# Altium PCB 4GLL.PcbDoc
Units mil, origin at the board's own origin, x right, y up, seen from the top; angles counter-clockwise.
Board outline 6000 x 4000 mil, 2 copper layers (Top Layer, Bottom Layer); 23 components, 12 nets, 284 pads, 0 vias.
Unrouted connection lines stored in the file: 42.
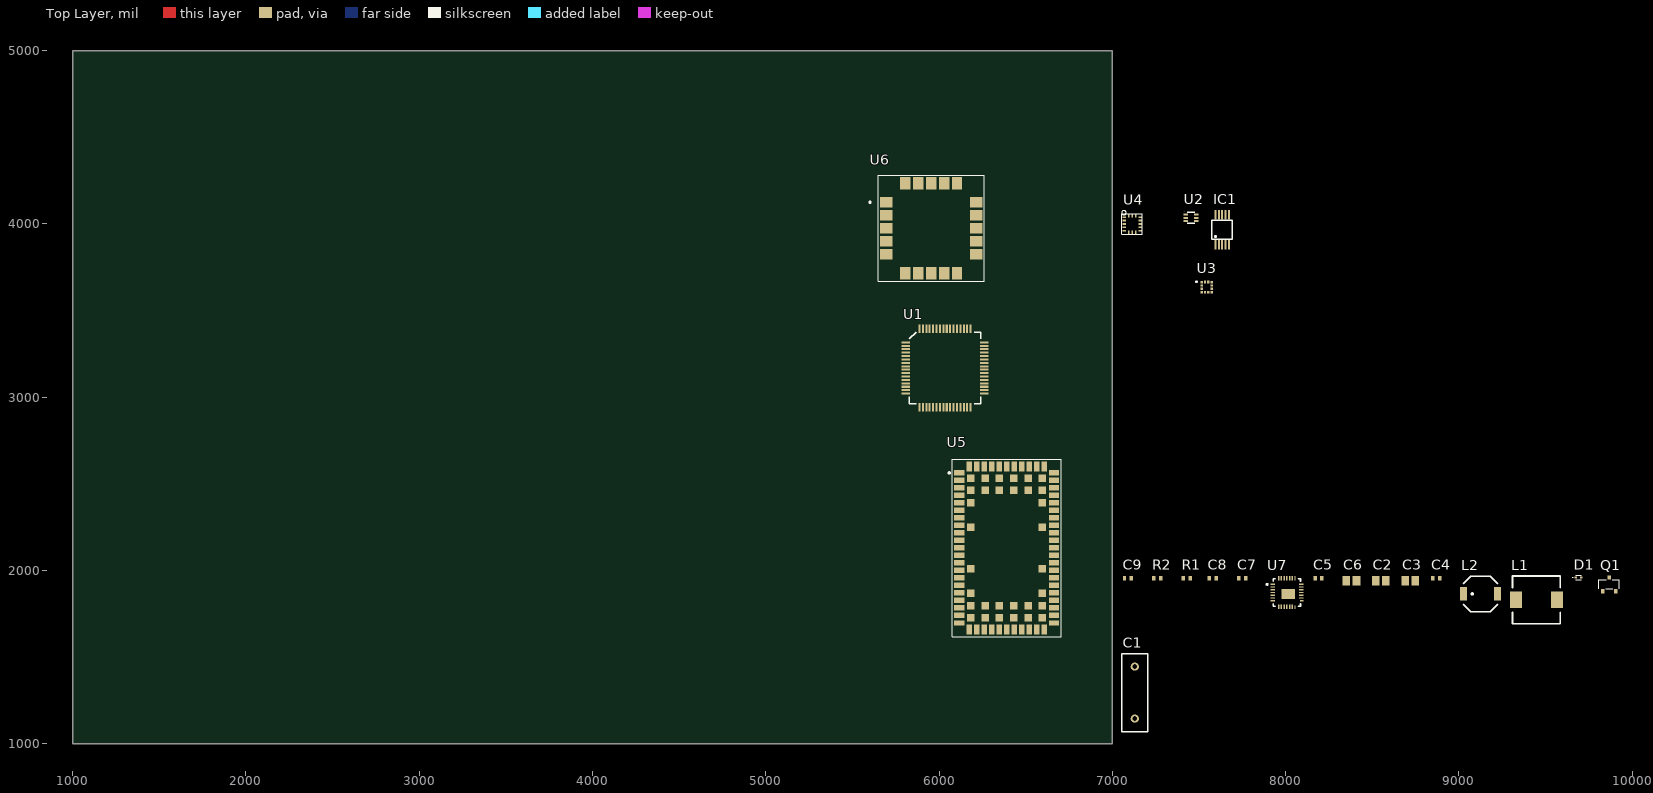
[diagram p0: Top Layer view]
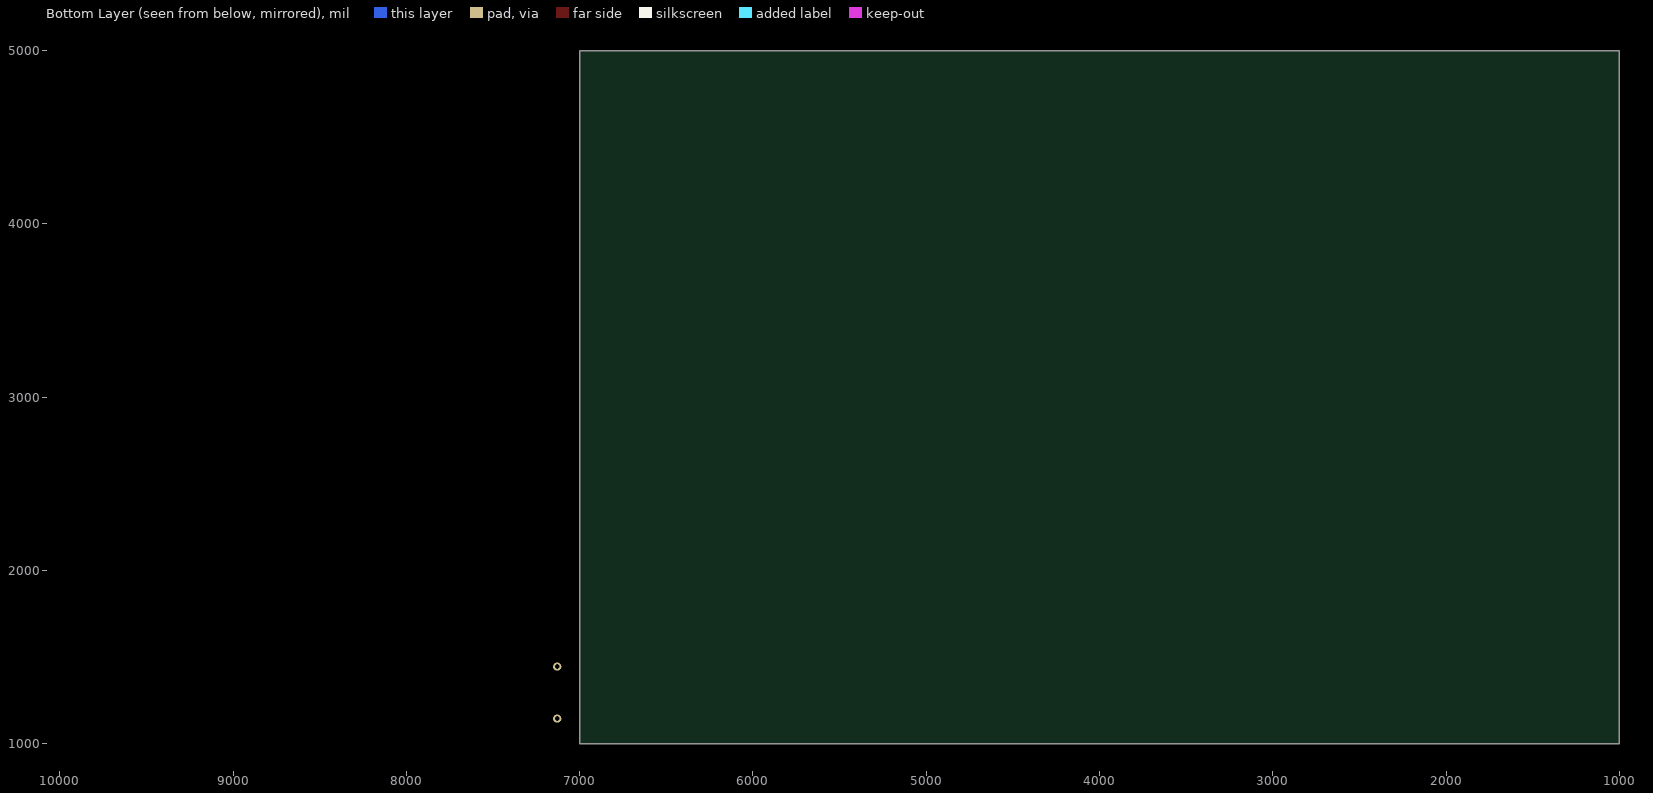
[diagram p1: Bottom Layer view, seen from below]

## Layer stack, top to bottom
Top Solder: solder mask 0.4, Solder Resist, Dk 3.5
Top Layer: signal copper 1.4
Dielectric 1: dielectric 12.6, FR-4, Dk 4.8
Bottom Layer: signal copper 1.4
Bottom Solder: solder mask 0.4, Solder Resist, Dk 3.5

## Board outline
1000,1000 7000,1000 7000,5000 1000,5000

## Design rules (kind name [scope] priority, off if disabled: settings)
Clearance [All] p1: gap=10 ignorepadtopadclearanceinfootprint=FALSE except(0: Arc-Hole Track-Hole SMDPad-Hole THPad-Hole Via-Hole Fill-Hole Poly-Hole Region-Hole Text-Hole)
PolygonConnect [All] p1: connectstyle=Relief reliefconductorwidth=10 reliefentries=4 polygonreliefangle="90 Angle" airgapwidth=10
RoomDefinition GPS [InComponentClass('GPS')] p1: confinementstyle=ConfineIn formatcopy=TRUE lockcomponents=FALSE outline 0,0 2000,0 2000,1000 0,1000
RoomDefinition 4G [InComponentClass('4G')] p2: confinementstyle=ConfineIn formatcopy=TRUE lockcomponents=FALSE outline 0,0 2000,0 2000,1000 0,1000
RoutingVias [All] p1: holewidth=28 width=50 viastyle="Through Hole" minholewidth=28 minwidth=50 maxholewidth=28 maxwidth=50
SolderMaskExpansion [All] p1: expansion=4 istentingtop=FALSE
Width [All] p1: maxlimit=10 minlimit=10 preferedwidth=10
30 further rules are at their usual default settings.

## Classes and differential pairs
component class GPS: U6
component class 4G: U5

## Components (designator, comment, footprint, x,y, rotation, side; value= is the part's Value field where it differs from the comment)
C1 "Cap" RAD-0.3 7130,1295 r90 top value=100pF
C2 "Cap_0805" 0805 8550,1940 r0 top value=100nF
C3 "Cap_0805" 0805 8720,1940 r0 top value=100nF
C4 "Cap_0402" 0402 8870,1955 r0 top value=100nF
C5 "Cap_0402" 0402 8190,1955 r0 top value=100nF
C6 "Cap_0805" 0805 8380,1940 r0 top value=100nF
C7 "Cap_0402" 0402 7750,1955 r0 top value=100nF
C8 "Cap_0402" 0402 7580,1955 r0 top value=100nF
C9 "Cap_0402" 0402 7090,1955 r0 top value=100nF
D1 "NSR0140P2" SOD-923 9675,1960 r0 top
IC1 "INA226" VSSOP-10 7595,3880 r90 top
L1 "SRR7045-102M" SRR7045-102M 9330,1830 r0 top value=X
L2 "SD53-4R7-R" SD53-4R7-R 9125,1865 r0 top value=X
Q1 "PMV130ENE" SOT-23 9830,1880 r0 top
R1 "Res_0402" 0402 7430,1955 r0 top value=1K
R2 "Res_0402" 0402 7260,1955 r0 top value=1K
U1 "STM32L452RET" LQFP64 5808.46,3316.26 r0 top
U2 "TMP112" "SOT563 (6)" 7425,4055 r0 top
U3 "LIS2DH12" LGA-12 7545.16,3634.98 r0 top
U4 "L3GD20HTR" LGA-16 7115,4000 r0 top
U5 "SARA-R4" SARA-XX 6390,2130 r0 top
U6 "SAM-M8" SAM-M8 5955,3975 r0 top
U7 "Sunboost 3" 28-QFN_0.4mm 7925,1920 r0 top

## Footprints (in the part's own frame and the unit in brackets; to place one, negate y for a bottom-side part, rotate by r counter-clockwise, add the part's x,y. Pads: shape width x height; smd on the part's side, far side on the other; paste and mask are expansions set on the pad)
28-QFN_0.4mm [mm]
  rect 0.65x0.2 smd mask+0.05: 1(0,0) 2(0,-0.4) 3(0,-0.8) 4(0,-1.2) 5(0,-1.6) 6(0,-2) 7(0,-2.4) 16(4.2,-2) 17(4.2,-1.6) 18(4.2,-1.2) 19(4.2,-0.8) 20(4.2,-0.4) 21(4.2,0)
  rect 0.2x0.65 smd mask+0.05: 8(0.9,-3.3) 9(1.3,-3.3) 10(1.7,-3.3) 11(2.1,-3.3) 12(2.5,-3.3) 13(2.9,-3.3) 22(3.3,0.9) 23(2.9,0.9) 24(2.5,0.9) 25(2.1,0.9) 26(1.7,0.9) 27(1.3,0.9) 28(0.9,0.9)
  rect 0.2x0.5 smd mask+0.05: 14(3.3,-3.375)
  rect 0.5x0.2 smd mask+0.05: 15(4.275,-2.4)
  rect 2x1.5 smd mask+0.05: 29(2.3,-1.4)
  silkscreen extent -0.9,-3.2 4.1,0.8, body extent 0.1,-3.2 4.1,0.8, height 0.75
0402 [mm]
  rect 0.5x0.6 smd mask+0.05: 1(-0.5,0) 2(0.5,0)
  body extent -0.5,-0.25 0.5,0.25, height 0.25
0805 [mm] "Chip Capacitor, Body 2.0x1.3mm, IPC High Density"
  rect 1.1x1.4 smd: 1(-0.75,0) 2(0.75,0)
  body extent -1.1,-0.72 1.1,0.72, height 1.4
LGA-12 [mm]
  rect 0.375x0.35 smd: 1(-0.763,0.75) 2(-0.763,0.25) 3(-0.763,-0.25) 4(-0.763,-0.75) 7(0.763,-0.75) 8(0.763,-0.25) 9(0.763,0.25) 10(0.763,0.75)
  rect 0.35x0.375 smd: 5(-0.25,-0.763) 6(0.25,-0.763) 11(0.25,0.763) 12(-0.25,0.763)
  silkscreen extent -1.6,0.7 -1.4,0.9, body extent -1,-1.02 1,0.98, height 0.68
LGA-16 [mm]
  rect 0.5x0.25 smd: P$1(-1.19,1) P$2(-1.19,0.5) P$3(-1.19,0) P$4(-1.19,-0.5) P$5(-1.19,-1) P$9(1.19,-1) P$10(1.19,-0.5) P$11(1.19,0) P$12(1.19,0.5) P$13(1.19,1)
  rect 0.25x0.5 smd: P$6(-0.5,-1.19) P$7(0,-1.19) P$8(0.5,-1.19) P$14(0.5,1.19) P$15(0,1.19) P$16(-0.5,1.19)
  silkscreen extent -1.53,-1.5 1.5,1.97, body extent -1.5,-1.5 1.5,1.5, height 0.79
LQFP64 [mm]
  rect 1.2x0.3 smd mask+0.05: 1(0,0) 2(0,-0.5) 3(0,-1) 4(0,-1.5) 5(0,-2) 6(0,-2.5) 7(0,-3) 8(0,-3.5) 9(0,-4) 10(0,-4.5) 11(0,-5) 12(0,-5.5) 13(0,-6) 14(0,-6.5) 15(0,-7) 16(0,-7.5) 33(11.5,-7.5) 34(11.5,-7) 35(11.5,-6.5) 36(11.5,-6) 37(11.5,-5.5) 38(11.5,-5) 39(11.5,-4.5) 40(11.5,-4) 41(11.5,-3.5) 42(11.5,-3) 43(11.5,-2.5) 44(11.5,-2) 45(11.5,-1.5) 46(11.5,-1) 47(11.5,-0.5) 48(11.5,0)
  rect 0.3x1.2 smd mask+0.05: 17(2,-9.5) 18(2.5,-9.5) 19(3,-9.5) 20(3.5,-9.5) 21(4,-9.5) 22(4.5,-9.5) 23(5,-9.5) 24(5.5,-9.5) 25(6,-9.5) 26(6.5,-9.5) 27(7,-9.5) 28(7.5,-9.5) 29(8,-9.5) 30(8.5,-9.5) 31(9,-9.5) 32(9.5,-9.5) 49(9.5,2) 50(9,2) 51(8.5,2) 52(8,2) 53(7.5,2) 54(7,2) 55(6.5,2) 56(6,2) 57(5.5,2) 58(5,2) 59(4.5,2) 60(4,2) 61(3.5,2) 62(3,2) 63(2.5,2) 64(2,2)
  silkscreen extent 0.5,-9 11,1.5, body extent -0.26,-9.76 11.76,2.26, height 1.2
RAD-0.3 [mm] "Radial Cap, Thru-Hole; 2 Leads; 0.3 in Pin Spacing"
  round 1.2 hole 0.7: 1(-3.81,0) 2(3.81,0)
  silkscreen extent -5.71,-1.91 5.71,1.91
SAM-M8 [mm] "ublox SAM antenna module"
  rect 1.8x1.5 smd paste-1.8: 1(-6.6,3.8) 2(-6.6,1.9) 3(-6.6,0) 4(-6.6,-1.9) 5(-6.6,-3.8) 11(6.6,-3.8) 12(6.6,-1.9) 13(6.6,0) 14(6.6,1.9) 15(6.6,3.8)
  rect 1.5x1.8 smd paste-1.8: 6(-3.8,-6.6) 7(-1.9,-6.6) 8(0,-6.6) 9(1.9,-6.6) 10(3.8,-6.6) 16(3.8,6.6) 17(1.9,6.6) 18(0,6.6) 19(-1.9,6.6) 20(-3.8,6.6)
  silkscreen extent -9.1,-7.77 7.74,7.74, body extent -7.75,-7.77 7.74,7.74, height 6.8
SARA-XX [mm] "GSM/GPRS and GSM/EGPRS/HSPA Cellular Module"
  rect 1.5x0.8 smd paste-1: 1(-6.95,11) 2(-6.95,9.9) 3(-6.95,8.8) 4(-6.95,7.7) 5(-6.95,6.6) 6(-6.95,5.5) 7(-6.95,4.4) 8(-6.95,3.3) 9(-6.95,2.2) 10(-6.95,1.1) 11(-6.95,0) 12(-6.95,-1.1) 13(-6.95,-2.2) 14(-6.95,-3.3) 15(-6.95,-4.4) 16(-6.95,-5.5) 17(-6.95,-6.6) 18(-6.95,-7.7) 19(-6.95,-8.8) 20(-6.95,-9.9) 21(-6.95,-11) 33(6.95,-11) 34(6.95,-9.9) 35(6.95,-8.8) 36(6.95,-7.7) 37(6.95,-6.6) 38(6.95,-5.5) 39(6.95,-4.4) 40(6.95,-3.3) 41(6.95,-2.2) 42(6.95,-1.1) 43(6.95,0) 44(6.95,1.1) 45(6.95,2.2) 46(6.95,3.3) 47(6.95,4.4) 48(6.95,5.5) 49(6.95,6.6) 50(6.95,7.7) 51(6.95,8.8) 52(6.95,9.9) 53(6.95,11)
  rect 0.8x1.5 smd paste-1: 22(-5.5,-11.95) 23(-4.4,-11.95) 24(-3.3,-11.95) 25(-2.2,-11.95) 26(-1.1,-11.95) 27(0,-11.95) 28(1.1,-11.95) 29(2.2,-11.95) 30(3.3,-11.95) 31(4.4,-11.95) 32(5.5,-11.95) 54(5.5,11.95) 55(4.4,11.95) 56(3.3,11.95) 57(2.2,11.95) 58(1.1,11.95) 59(0,11.95) 60(-1.1,11.95) 61(-2.2,11.95) 62(-3.3,11.95) 63(-4.4,11.95) 64(-5.5,11.95)
  rect 1.1x1.1 smd paste-0.025: 65(-5.25,10.25) 66(-3.15,10.25) 67(-1.05,10.25) 68(1.05,10.25) 69(3.15,10.25) 70(5.25,10.25) 71(-5.25,8.45) 72(-3.15,8.45) 73(-1.05,8.45) 74(1.05,8.45) 75(3.15,8.45) 76(5.25,8.45) 77(-5.25,6.65) 78(5.25,6.65) 79(-5.25,3.05) 80(5.25,3.05) 81(-5.25,-3.05) 82(5.25,-3.05) 83(-5.25,-6.65) 84(5.25,-6.65) 85(-5.25,-8.45) 86(-3.15,-8.45) 87(-1.05,-8.45) 88(1.05,-8.45) 89(3.15,-8.45) 90(5.25,-8.45) 91(-5.25,-10.25) 92(-3.15,-10.25) 93(-1.05,-10.25) 94(1.05,-10.25) 95(3.15,-10.25) 96(5.25,-10.25)
  silkscreen extent -8.45,-13 8,13, body extent -8,-13.05 8,13, height 3.25
SD53-4R7-R [mm]
  rect 1x2 smd mask+0.05: 1(-2.5,0) 2(2.5,0)
  silkscreen extent -2.5,-2.6 2.5,2.6, body extent -2.6,-2.6 2.6,2.6, height 3
SOD-923 [mm]
  rect 0.36x0.25 smd mask+0.05: 1(0,0) 2(0.8,0)
  silkscreen extent -0.47,-0.33 0.8,0.33, body extent -0.12,-0.32 0.93,0.32, height 0.43
"SOT563 (6)" [mm] "SOT563 (6)"
  rect 0.67x0.3 smd mask+0.05: 1(0,0) 2(0,-0.5) 3(0,-1) 4(1.5,-1) 5(1.5,-0.5) 6(1.5,0)
  silkscreen extent 0.2,-1.3 1.3,0.3, body extent -0.06,-1.3 1.56,0.3, height 0.58
SOT-23 [mm]
  rect 0.5x0.6 smd mask+0.05: 1(0,0) 2(1.9,0) 3(0.95,2)
  silkscreen extent -0.55,0.35 2.45,1.7, body extent -0.55,-0.25 2.45,2.25, height 1.1
SRR7045-102M [mm]
  rect 1.8x2.4 smd mask+0.05: 1(0,0) 2(6,0)
  silkscreen extent -0.5,-3.5 6.5,3.5, body extent -0.5,-3.5 6.5,3.5, height 4.5
VSSOP-10 [mm]
  rect 1.45x0.3 smd mask+0.05: 1(0,0) 2(0,-0.5) 3(0,-1) 4(0,-1.5) 5(0,-2) 6(4.4,-2) 7(4.4,-1.5) 8(4.4,-1) 9(4.4,-0.5) 10(4.4,0)
  silkscreen extent 0.8,-2.5 3.6,0.5, body extent -0.3,-2.5 4.63,0.5, height 1.1

## Part data
C1 C2 C3 C4 C5 C6 C7 C8 C9: "Capacitor", LatestRevisionDate=17-Jul-2002, LatestRevisionNote="Re-released for DXP Platform.", PackageDescription="Radial Cap, Thru-Hole; 2 Leads; 0.3 in Pin Spacing", PackageReference=RAD-0.3, Published=8-Jun-2000, Publisher="Altium Limited"
D1: "Typical INFRARED GaAs LED", LatestRevisionDate=08-Jul-2005, LatestRevisionNote="Mech Layer 1 removed.", PackageDescription="LED; 2 Leads", PackageReference=LED-0, Published=8-Jun-2000, Publisher="Altium Limited"
IC1: "Bi-Directional Current and Power Monitor"
L1 L2: "Inductor"
Q1: "N-Channel MOSFET", LatestRevisionDate=17-Jul-2002, LatestRevisionNote="Re-released for DXP Platform.", PackageDescription="TO, Flat Index; 3 In-Line, Axial Leads; Body Dia. 4.6mm; Lead Dia. 0.5 mm (max)", PackageReference=E3, PackageVersion=1995/1996, Published=8-Jun-2000, Publisher="Altium Limited"
R1 R2: "Resistor", LatestRevisionDate=17-Jul-2002, LatestRevisionNote="Re-released for DXP Platform.", PackageDescription="Axial Device, Thru-Hole; 2 Leads; 0.4 in Pin Spacing", PackageReference=AXIAL-0.4, Published=8-Jun-2000, Publisher="Altium Limited"
U1: "MCU", Man. Part no=STM32L452RET6, Digikey no=497-17219-ND, Farnell no=2758810
U2: "Temperature measurement unit", Man. Part no.=TMP112AIDRLR, Digikey no.=296-38578-1-ND, Farnell no.=3009067
U3: "Accelerometer X, Y, Z Axis Â±2g, 4g, 8g, 16g 0.5Hz ~ 672Hz 12-LGA _2x2_", Package="LGA-12 STMicroelectronics", Availability=Unavailable, MF=STMicroelectronics, MP=LIS2DH12, Price=None, SnapEDA_Link=https://www.snapeda.com/parts/LIS2DH12/STMicroelectronics/view-part/480350/?ref=snap
U4: "Gyroscope X _Pitch_, Y _Roll_, Z _Yaw_ Â±245, 500, 2000 6.25Hz ~ 400Hz IÂ²C, SPI 16-LGA _3x3_", Package="LGA-16 STMicroelectronics", Digi-Key_Part_Number=497-13931-1-ND, Digi-Key_Purchase_URL=https://www.digikey.com/product-detail/en/stmicroelectronics/L3GD20HTR/497-13931-1-ND/4357644?utm_source=snapeda&utm_medium=aggregator&utm_campaign=symbol, MF=STMicroelectronics, MP=L3GD20HTR, SnapEDA_Link=https://www.snapeda.com/parts/L3GD20HTR/STMicroelectronics/view-part/125620/?ref=snap
U5: "4G LTE module"
U6: "GNSS moduleS"
U7: "Initvation Sunboost 3"

## Nets (pads, with @x,y where several pads share a name; then routed paths per layer and width w, separated by ;. In a path a pad name is that pad's centre, name@x,y a point inside that pad or via, vN(x,y) a via of type N, cw(c..) or ccw(c..) an arc to the next point about the centre after c; other vN are vias at no path point)
DGND: C7.1 C8.1 R1.1 U7.7 U7.8
GND: C2.1 C3.1 C4.1 C5.1 C6.1 C9.1 Q1.3 R1.2 U7.2 U7.4 U7.6 U7.27 U7.28 U7.29
ICSP: U7.18
ICSPCLK: U7.10
ICSPDAT: U7.11
NetC8_2: C8.2 U7.15
NetC9_2: C9.2 R2.2 U7.9
NetD1_1: D1.1 L1.2 Q1.1
NetL2_2: L2.2 U7.1 U7.3 U7.5 U7.23 U7.25 U7.26
PWM: Q1.2 U7.12 U7.19
Solar+: C2.2 C3.2 C4.2 L1.1 L2.1 R2.1
VCC: C5.2 C6.2 C7.2 D1.2 U7.16 U7.21 U7.22 U7.24
pads on no net: C1.1 C1.2 IC1.1 IC1.2 IC1.3 IC1.4 IC1.5 IC1.6 IC1.7 IC1.8 IC1.9 IC1.10 U1.1 U1.2 U1.3 U1.4 U1.5 U1.6 U1.7 U1.8 U1.9 U1.10 U1.11 U1.12 U1.13 U1.14 U1.15 U1.16 U1.17 U1.18 U1.19 U1.20 U1.21 U1.22 U1.23 U1.24 U1.25 U1.26 U1.27 U1.28 U1.29 U1.30 U1.31 U1.32 U1.33 U1.34 U1.35 U1.36 U1.37 U1.38 U1.39 U1.40 U1.41 U1.42 U1.43 U1.44 U1.45 U1.46 U1.47 U1.48 U1.49 U1.50 U1.51 U1.52 U1.53 U1.54 U1.55 U1.56 U1.57 U1.58 U1.59 U1.60 U1.61 U1.62 U1.63 U1.64 U2.1 U2.2 U2.3 U2.4 U2.5 U2.6 U3.1 U3.2 U3.3 U3.4 U3.5 U3.6 U3.7 U3.8 U3.9 U3.10 U3.11 U3.12 U4.P$1 U4.P$2 U4.P$3 U4.P$4 U4.P$5 U4.P$6 U4.P$7 U4.P$8 U4.P$9 U4.P$10 U4.P$11 U4.P$12 U4.P$13 U4.P$14 U4.P$15 U4.P$16 U5.1 U5.2 U5.3 U5.4 U5.5 U5.6 U5.7 U5.8 U5.9 U5.10 U5.11 U5.12 U5.13 U5.14 U5.15 U5.16 U5.17 U5.18 U5.19 U5.20 U5.21 U5.22 U5.23 U5.24 U5.25 U5.26 U5.27 U5.28 U5.29 U5.30 U5.31 U5.32 U5.33 U5.34 U5.35 U5.36 U5.37 U5.38 U5.39 U5.40 U5.41 U5.42 U5.43 U5.44 U5.45 U5.46 U5.47 U5.48 U5.49 U5.50 U5.51 U5.52 U5.53 U5.54 U5.55 U5.56 U5.57 U5.58 U5.59 U5.60 U5.61 U5.62 U5.63 U5.64 U5.65 U5.66 U5.67 U5.68 U5.69 U5.70 U5.71 U5.72 U5.73 U5.74 U5.75 U5.76 U5.77 U5.78 U5.79 U5.80 U5.81 U5.82 U5.83 U5.84 U5.85 U5.86 U5.87 U5.88 U5.89 U5.90 U5.91 U5.92 U5.93 U5.94 U5.95 U5.96 U6.1 U6.2 U6.3 U6.4 U6.5 U6.6 U6.7 U6.8 U6.9 U6.10 U6.11 U6.12 U6.13 U6.14 U6.15 U6.16 U6.17 U6.18 U6.19 U6.20 U7.13 U7.14 U7.17 U7.20